# Allegro board qcw.brd
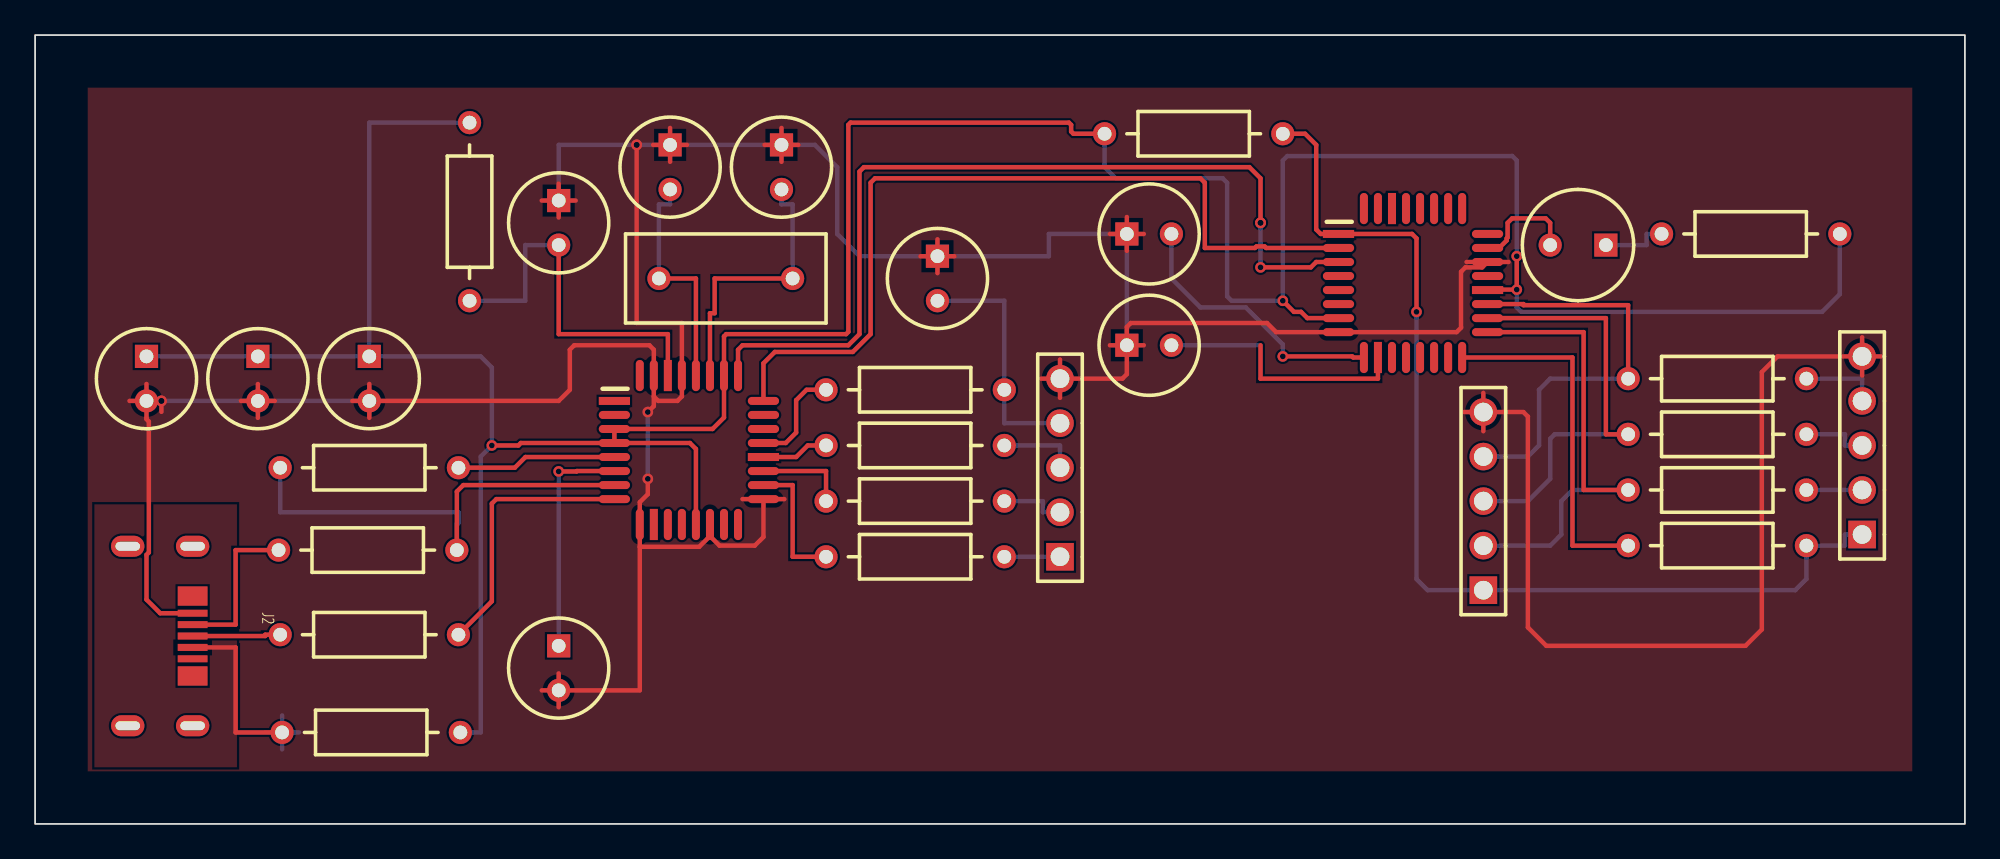
[diagram p0: board, top side]
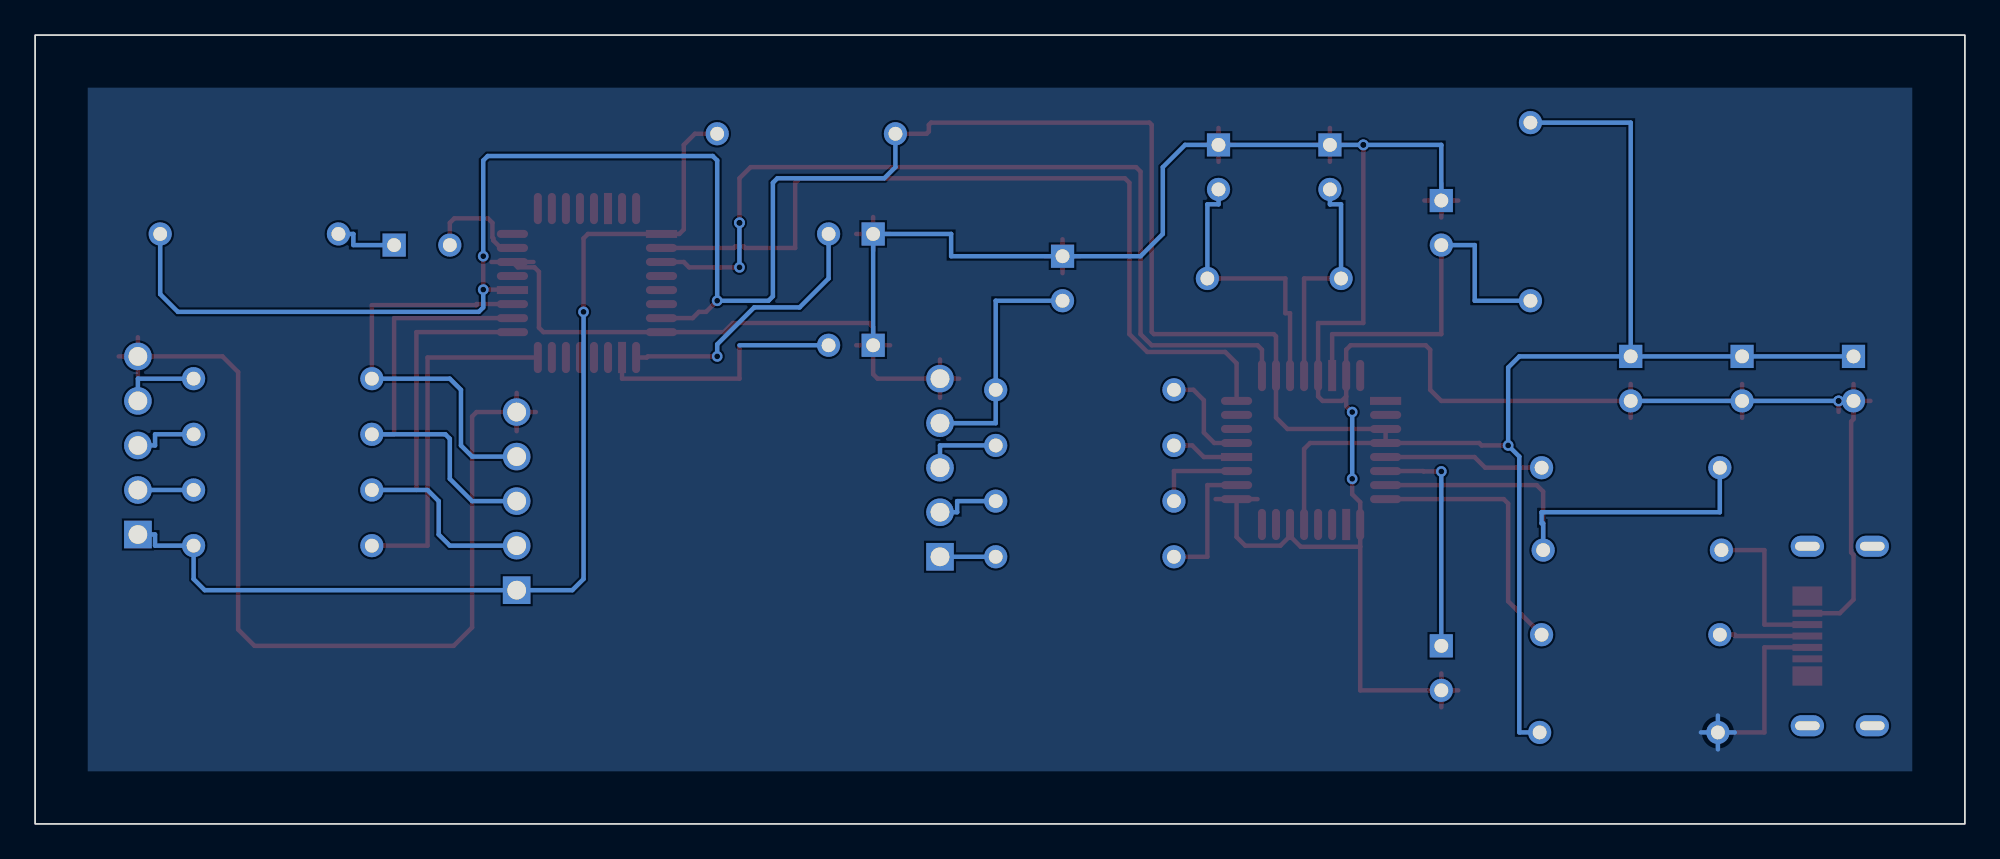
[diagram p1: board, bottom side, seen from below]

Outline 110 x 45 mm; copper layers: TOP, BOTTOM. Coordinates in mm from the lower left corner of the outline.
Outline path: rectangle 0,0 110,45

## Placement (name value [footprint] x y rotation side)
C1  47nF  [CPCYL1D225LS100031]  29.84 35.56 270 top
C2  27pF  [CPCYL1D225LS100031]  36.19 38.73 270 top
C3  27pF  [CPCYL1D225LS100031]  42.55 38.73 270 top
C4  47nF  [CPCYL1D225LS100031]  29.84 10.16 270 top
C5  100nF  [CPCYL1D225LS100031]  12.7 26.67 270 top
C6  1uF  [CPCYL1D225LS100031]  6.35 26.67 270 top
C7  100nF  [CPCYL1D225LS100031]  62.23 33.66 0 top
C8  100nF  [CPCYL1D225LS100031]  62.23 27.3 0 top
C9  100nF  [CPCYL1D225LS100031]  19.05 26.67 270 top
C10  22nF  [CPCYL1D225LS100031]  51.44 32.38 270 top
D1  LED  [CYLD250LS125031]  89.53 33.02 180 top
IC1  ATmega8  [QUAD80M32WG900]  74.3 33.66 270 top
J1  bbpg_Bitbang  [BLKCON100VHTM1SQSW1005]  58.42 15.24 90 top
J2  USBA  [MICRO_USB]  5.28 10.72 270 top
J3  avrusb500_out  [BLKCON100VHTM1SQSW1005]  104.14 16.51 90 top
J4  firmware_in  [BLKCON100VHTM1SQSW1005]  82.55 13.33 90 top
NOREF  -  []  0 45 0 top
NOREF#2  -  []  110 0 90 top
R1  470  [AX400X100031]  24.76 29.84 90 top
R2  220  [AX400X100031]  45.08 24.76 0 top
R3  220  [AX400X100031]  45.08 21.59 0 top
R4  220  [AX400X100031]  45.08 18.41 0 top
R5  27  [AX400X100031]  13.97 10.79 0 top
R6  27  [AX400X100031]  13.88 15.62 0 top
R7  1.5k  [AX400X100031]  13.97 20.32 0 top
R8  2.2  [AX400X100031]  14.08 5.22 0 top
R9  10k  [AX400X100031]  60.96 39.37 0 top
R10  470  [AX400X100031]  92.71 33.66 0 top
R11  1k  [AX400X100031]  90.81 25.4 0 top
R12  220  [AX400X100031]  90.81 22.22 0 top
R13  1k  [AX400X100031]  90.81 19.05 0 top
R14  220  [AX400X100031]  45.08 15.24 0 top
R15  220  [AX400X100031]  90.81 15.88 0 top
U1  FT232BM  [QUAD80M32WG900]  33.02 24.13 270 top
Y2  6Mhz  [RAD450X200LS300031]  35.56 31.11 0 top

## Library data of the parts
C1-C5 C7-C10 = CAPACITOR NON-POL: alternate symbols: (SMDCAP)
C6 = CAPACITOR POL: alternate symbols: (SMDCAP)
D1 = LED
IC1 = ATmega8-DIL28_1
J1 J3 J4 = CON5
J2 = CON4_7
R1-R15 = R: alternate symbols: (SMDRES)
U1 = FT232BM_2
Y2 = ZTA

## Footprints (pads in the part's own frame, mm; a bottom-side part is the same pattern mirrored in y, then rotated)
AX400X100031
  round 1.321 hole 0.787: 1(0,0) 2(10.16,0)
BLKCON100VHTM1SQSW1005
  rect 1.575x1.575 hole 1.067: 1(0,0)
  round 1.575 hole 1.067: 2(2.54,0) 3(5.08,0) 4(7.62,0) 5(10.16,0)
CPCYL1D225LS100031
  rect 1.321x1.321 hole 0.787: 1(0,0)
  round 1.321 hole 0.787: 2(2.54,0)
CYLD250LS125031
  rect 1.321x1.321 hole 0.787: 1(0,0)
  round 1.321 hole 0.787: 2(3.175,0)
MICRO_USB
  oval 1.2x1.9 hole 0.5x1.4: (-5.12,3.7) (-5.12,0) (5.12,3.7) (5.12,0)
  rect 1.1x1.7 smd: (-2.28,3.7) (2.28,3.7)
  rect 0.4x1.7 smd: 1(-1.3,3.7) 2(-0.65,3.7) 3(0,3.7) 4(0.65,3.7) 5(1.3,3.7)
QUAD80M32WG900
  rect 0.457x1.778 smd: 1(0,0) 20(3.2,8.496)
  oval 0.457x1.778 smd: 2(0.8,0) 3(1.6,0) 4(2.4,0) 5(3.2,0) 6(4,0) 7(4.801,0) 8(5.601,0) 17(5.601,8.496) 18(4.801,8.496) 19(4,8.496) 21(2.4,8.496) 22(1.6,8.496) 23(0.8,8.496) 24(0,8.496)
  oval 1.778x0.457 smd: 9(7.048,1.448) 11(7.048,3.048) 12(7.048,3.848) 13(7.048,4.648) 14(7.048,5.448) 15(7.048,6.248) 16(7.048,7.048) 25(-1.448,7.048) 26(-1.448,6.248) 27(-1.448,5.448) 28(-1.448,4.648) 29(-1.448,3.848) 31(-1.448,2.248) 32(-1.448,1.448)
  rect 1.778x0.457 smd: 10(7.048,2.248) 30(-1.448,3.048)
RAD450X200LS300031
  round 1.321 hole 0.787: 1(0,0) 2(7.62,0)

## Nets
+5V: J2.4 R8.1
GND: C1.1 C2.1 C3.1 C4.2 C5.2 C6.2 C7.1 C8.1 C9.2 C10.1 IC1.8(GND) IC1.22(AGND) J1.5 J2.1 J3.5 J4.5 U1.9(GND) U1.14(PWRCTL) U1.17(GND1) U1.29(AGND) U1.31(TEST)
VCC: C5.1 C6.1 C9.1 IC1.7(VCC) IC1.20(AVCC) R1.2 R8.2 R9.1 R10.2 U1.3(VCC) U1.4(RESET#) U1.13(VCC-IO) U1.26(VCC1)
BMISO: J1.3 R3.2
BMOSI: J1.2 R4.2
BRESET: J1.1 R14.2
BSCK: C10.2 J1.4 R2.2
D+: J2.2 R6.1
D-: J2.3 R5.1
F_MISO: IC1.18((MISO) PB4) J4.3 R12.1
F_MOSI: IC1.17((OC2/MOSI) PB3) J4.2 R13.1
F_SCK: IC1.19((SCK) PB5) J4.4 R11.1
MISO: J3.3 R12.2
MOSI: J3.2 R13.2
RESET: IC1.1(PC6 (R\E\S\E\T\)) J3.1 J4.1 R9.2 R15.2
RXD: IC1.2(PD0 (RXD)) U1.24(RXD)
SCK: J3.4 R11.2
TXD: IC1.3(PD1 (TXD)) U1.25(TXD)
N02483: R6.2 R7.1 U1.7(USBDP)
N02615: R5.2 U1.8(USBDM)
N03527: C4.1 U1.6(3V3OUT)
N06839: R2.1 U1.21(DTR#)
N06967: R3.1 U1.20(DSR#)
N07033: R4.1 U1.19(DCD#)
N07247: R14.1 U1.18(RI#)
N11951: R7.2 U1.5(RSTOUT#)
N15182: C7.2 IC1.9(PB6 (XT1/TOSC1))
N15289: C8.2 IC1.10(PB7 (XT2/TOSC2))
N19734: D1.2(CATHODE) IC1.23((ADC0) PC0)
N20572: D1.1(ANODE) R10.1
N22544: IC1.16((SS/OC1B) PB2) R15.1
N41098: C3.2 U1.27(XTIN) Y2.2
N41106: C2.2 U1.28(XTOUT) Y2.1
N49165: C1.2 R1.1 U1.30(AVCC)

Pads without a net: IC1 4 5 6 11 12 13 14 15 21 24 25 26 27 28 29 30 31 32; J2 5; U1 1 2 10 11 12 15 16 22 23 32

## Via types
v1: diameter 0.61, hole 0.33, TOP to BOTTOM, 16 vias

## Routing (per net, layer and track width the routed paths; a pad name or vN(x,y) marks a point on that pad's centre or on a via; arc(x,y) is an arc through that point)
+5V: length 13.8
  TOP w0.254: J2.4 11.43,10.07 11.43,5.22 R8.1
  BOTTOM w0.254: 14.08,4.25 R8.1 ; R8.1 14.08,6.19 ; R8.1 15.05,5.22 ; R8.1 13.11,5.22
GND: length 276.5
  TOP w0.254: J3.5 105.23,26.67 ; J3.5 99.32,26.67 98.43,25.78 98.43,11.09 97.5,10.16 86.14,10.16 85.09,11.21 85.09,23.24 84.84,23.49 J4.5 ; J3.5 104.14,27.76 ; J3.5 104.14,25.58 ; U1.17 41.52,16.37 41.02,15.88 39.01,15.88 38.47,16.42 ; U1.17 40.32,18.53 ; U1.17 42.71,18.53 ; C8.1 62.23,28.35 62.46,28.57 70.22,28.57 70.74,28.05 IC1.8 81.03,28.05 81.28,28.31 81.28,31.5 81.53,31.75 82.49,31.75 IC1.22 ; C8.1 62.23,25.65 61.98,25.4 J1.5 ; C8.1 61.26,27.3 ; C8.1 63.2,27.3 ; 58.42,24.31 J1.5 ; J1.5 58.42,26.49 ; J1.5 57.33,25.4 ; 34.47,15.81 34.47,7.62 C4.2 ; 34.47,15.81 U1.9 34.47,18.35 34.93,18.81 v1(34.93,19.68) ; 34.47,15.81 37.86,15.81 38.47,16.42 ; IC1.22 81.6,32.05 ; IC1.22 83.99,32.05 ; C1.1 30.81,35.56 ; C1.1 29.84,34.59 ; C1.1 28.88,35.56 ; C1.1 29.84,36.53 ; 38.47,16.42 U1.14 ; J4.5 81.46,23.49 ; J4.5 82.55,22.4 ; J4.5 82.55,24.59 ; 41.58,38.73 C3.1 ; C3.1 42.55,37.77 ; C3.1 42.55,39.7 ; C3.1 43.51,38.73 ; 28.88,7.62 C4.2 ; C4.2 29.84,8.59 ; C4.2 29.84,6.65 ; C2.1 36.19,39.7 ; C2.1 37.16,38.73 ; C2.1 36.19,37.77 ; C2.1 35.23,38.73 ; 7.2,23.51 v1(7.2,24.13) ; C10.1 52.4,32.38 ; C10.1 51.44,33.35 ; C10.1 51.44,31.42 ; C10.1 50.47,32.38 ; 11.73,24.13 C5.2 ; C5.2 12.7,25.1 ; C5.2 12.7,23.16 ; C5.2 13.67,24.13 ; 62.23,32.69 C7.1 ; C7.1 62.23,34.62 ; C7.1 63.2,33.66 ; C7.1 61.26,33.66 ; C9.2 29.84,24.13 30.48,24.76 30.48,27.05 30.73,27.3 35.01,27.3 35.27,27.05 U1.31 35.27,24.38 ; C9.2 19.05,23.16 ; C9.2 18.08,24.13 ; C9.2 19.05,25.1 ; 35.27,24.38 35.52,24.13 36.61,24.13 36.87,24.38 U1.29 36.87,28.57 34.29,28.57 v1(34.29,38.73) ; 35.27,24.38 35.27,23.84 v1(34.93,23.49) ; C6.2 6.35,25.1 ; C6.2 5.38,24.13 ; C6.2 6.35,23.09 6.48,22.95 6.48,15.49 6.35,15.35 6.35,12.8 7.13,12.02 J2.1
  BOTTOM w0.254: C1.1 29.84,38.73 v1(34.29,38.73) C2.1 C3.1 44.45,38.73 45.72,37.46 45.72,33.66 46.99,32.38 C10.1 57.78,32.38 57.78,33.66 C7.1 C8.1 ; v1(34.93,23.49) v1(34.93,19.68) ; C9.2 C5.2 v1(7.2,24.13) C6.2
VCC: length 200
  TOP w0.254: IC1.20 82.82,30.48 v1(84.45,30.48) v1(84.45,32.38) ; IC1.7 72.52,28.85 72.16,29.21 71.75,29.21 v1(71.12,29.84) ; U1.4 37.32,21.73 37.67,21.39 U1.13 ; U1.4 U1.3 38.62,22.53 39.27,23.18 U1.26 39.27,27.81 39.39,27.94 46.23,27.94 46.36,28.07 46.36,39.88 46.48,40 58.93,40 59.06,39.88 59.06,39.5 59.18,39.37 R9.1 ; U1.4 27.69,21.73 27.55,21.59 v1(26.03,21.59)
  BOTTOM w0.254: C6.1 C5.1 C9.1 ; C9.1 25.4,26.67 26.03,26.03 v1(26.03,21.59) 25.4,20.95 25.4,5.22 R8.2 ; C9.1 19.05,40 R1.2 ; v1(84.45,30.48) 84.45,29.46 84.71,29.21 101.86,29.21 102.87,30.22 R10.2 ; R9.1 60.96,37.46 61.59,36.83 67.69,36.83 67.94,36.58 67.94,30.1 68.2,29.84 v1(71.12,29.84) 71.12,37.85 71.37,38.1 84.2,38.1 84.45,37.85 v1(84.45,32.38)
BMISO: length 4.4
  BOTTOM w0.254: R3.2 58.42,21.59 J1.3
BMOSI: length 3.8
  BOTTOM w0.254: R4.2 57.44,18.41 57.44,17.78 J1.2
BRESET: length 3.2
  BOTTOM w0.254: R14.2 J1.1
BSCK: length 14
  BOTTOM w0.254: C10.2 55.25,29.84 R2.2 55.25,22.86 J1.4
D+: length 9.1
  TOP w0.254: J2.2 11.43,11.37 11.43,15.62 R6.1
D-: length 5.1
  TOP w0.254: J2.3 13.12,10.72 13.12,10.79 R5.1
F_MISO: length 25.8
  TOP w0.254: IC1.18 89.53,28.85 89.53,22.22 R12.1
  BOTTOM w0.254: R12.1 86.61,22.22 86.36,21.97 86.36,19.68 85.09,18.41 J4.3
F_MOSI: length 27.7
  TOP w0.254: R13.1 88.26,19.05 88.26,28.05 IC1.17
  BOTTOM w0.254: R13.1 87.63,19.05 87,18.41 87,16.51 86.36,15.88 82.55,15.88
F_SCK: length 24.2
  TOP w0.254: R11.1 90.81,29.59 84.84,29.59 84.84,29.66 IC1.19
  BOTTOM w0.254: J4.4 85.09,20.95 85.73,21.59 85.73,24.76 86.36,25.4 R11.1
MISO: length 3.8
  BOTTOM w0.254: 100.96,22.22 103.16,22.22 103.16,21.59 J3.3
MOSI: length 3.2
  BOTTOM w0.254: 100.96,19.05 J3.2
RESET: length 60.8
  TOP w0.254: v1(78.74,29.21) 78.74,33.4 78.49,33.66 IC1.1 73.28,33.66 73.02,33.91 73.02,38.73 72.39,39.37 R9.2
  BOTTOM w0.254: J3.1 103.16,16.51 103.16,15.88 100.96,15.88 100.96,13.97 100.33,13.33 J4.1 79.38,13.33 78.74,13.97 v1(78.74,29.21)
RXD: length 48.3
  TOP w0.254: U1.24 41.52,26.28 42.16,26.92 46.61,26.92 47.62,27.94 47.62,36.58 47.88,36.83 66.42,36.83 66.68,36.58 66.68,32.85 69.53,32.85 69.62,32.94 70.08,32.94 70.17,32.85 IC1.2
SCK: length 4.4
  BOTTOM w0.254: 100.96,25.4 104.14,25.4 J3.4
TXD: length 50.9
  TOP w0.254: IC1.3 73.02,32.05 72.72,31.75 v1(69.85,31.75) ; U1.25 40.07,27.05 40.32,27.3 46.36,27.3 46.99,27.94 46.99,37.21 47.24,37.46 69.21,37.46 69.85,36.83 v1(69.85,34.29)
  BOTTOM w0.254: v1(69.85,34.29) v1(69.85,31.75)
N02483: length 27.4
  TOP w0.254: 33.02,19.33 24.41,19.33 24.04,18.96 R6.2
  BOTTOM w0.254: R6.2 24.04,17.14 24.13,17.14 24.13,17.78 13.97,17.78 R7.1
N02615: length 15.4
  TOP w0.254: U1.8 26.29,18.53 26.03,18.27 26.03,12.7 R5.2
N03527: length 13.1
  TOP w0.254: U1.6 30.88,20.13 30.86,20.11 v1(29.84,20.11)
  BOTTOM w0.254: C4.1 v1(29.84,20.11)
N06839: length 5.9
  TOP w0.254: U1.21 42.79,21.73 43.38,22.32 43.38,24.17 43.98,24.76 R2.1
N06967: length 3.8
  TOP w0.254: R3.1 44.04,21.59 43.38,20.93 U1.20
N07033: length 5.3
  TOP w0.254: R4.1 45.08,20.13 U1.19
N07247: length 7.7
  TOP w0.254: 41.52,19.33 43.18,19.33 43.18,15.24 R14.1
N11951: length 9.1
  TOP w0.254: R7.2 27.34,20.32 27.95,20.93 U1.5
N15182: length 15.8
  TOP w0.254: v1(71.12,26.67) 75.07,26.67 75.13,26.61 IC1.9 75.74,26.67
  BOTTOM w0.254: v1(71.12,26.67) 71.12,27.36 69.01,29.46 66.42,29.46 64.77,31.11 C7.2
N15289: length 14.9
  TOP w0.254: 69.85,27.3 69.85,25.4 76.54,25.4 IC1.10
  BOTTOM w0.254: C8.2 69.85,27.3
N19734: length 6.2
  TOP w0.254: IC1.23 83.45,32.85 83.88,33.29 83.88,33.4 83.93,33.46 83.93,34.29 84.19,34.54 86.11,34.54 86.36,34.29 D1.2
N20572: length 3.8
  BOTTOM w0.254: R10.1 91.86,33.66 91.86,33.02 D1.1
N22544: length 20.2
  TOP w0.254: R15.1 87.63,15.88 87.63,26.61 IC1.16
N41098: length 16
  TOP w0.254: U1.27 38.47,29.13 38.74,29.13 38.74,31.11 Y2.2
  BOTTOM w0.254: C3.2 42.55,35.34 43.18,35.34 Y2.2
N41106: length 13.4
  TOP w0.254: Y2.1 37.67,31.11 U1.28
  BOTTOM w0.254: Y2.1 35.56,35.34 36.19,35.34 C2.2
N49165: length 21.9
  TOP w0.254: U1.30 36.07,27.94 29.84,27.94 C1.2
  BOTTOM w0.254: R1.1 27.94,29.84 27.94,33.02 C1.2

## Copper pours and planes (outline as drawn; the poured copper is in the pictures)
+5V on TOP: 3.38,18.23 3.38,3.23 11.5,3.23 11.5,18.23
+5V on BOTTOM: 3,3 3,42 107,42 107,3
GND on TOP: 3,3 3,42 107,42 107,3
